# Altium PCB PCB1.PcbDoc
Units mm, origin at the board's own origin, x right, y up, seen from the top; angles counter-clockwise.
Board outline 80.2 x 98.1 mm, 2 copper layers (Top Layer, Bottom Layer); 114 components, 0 nets, 391 pads, 57 vias.
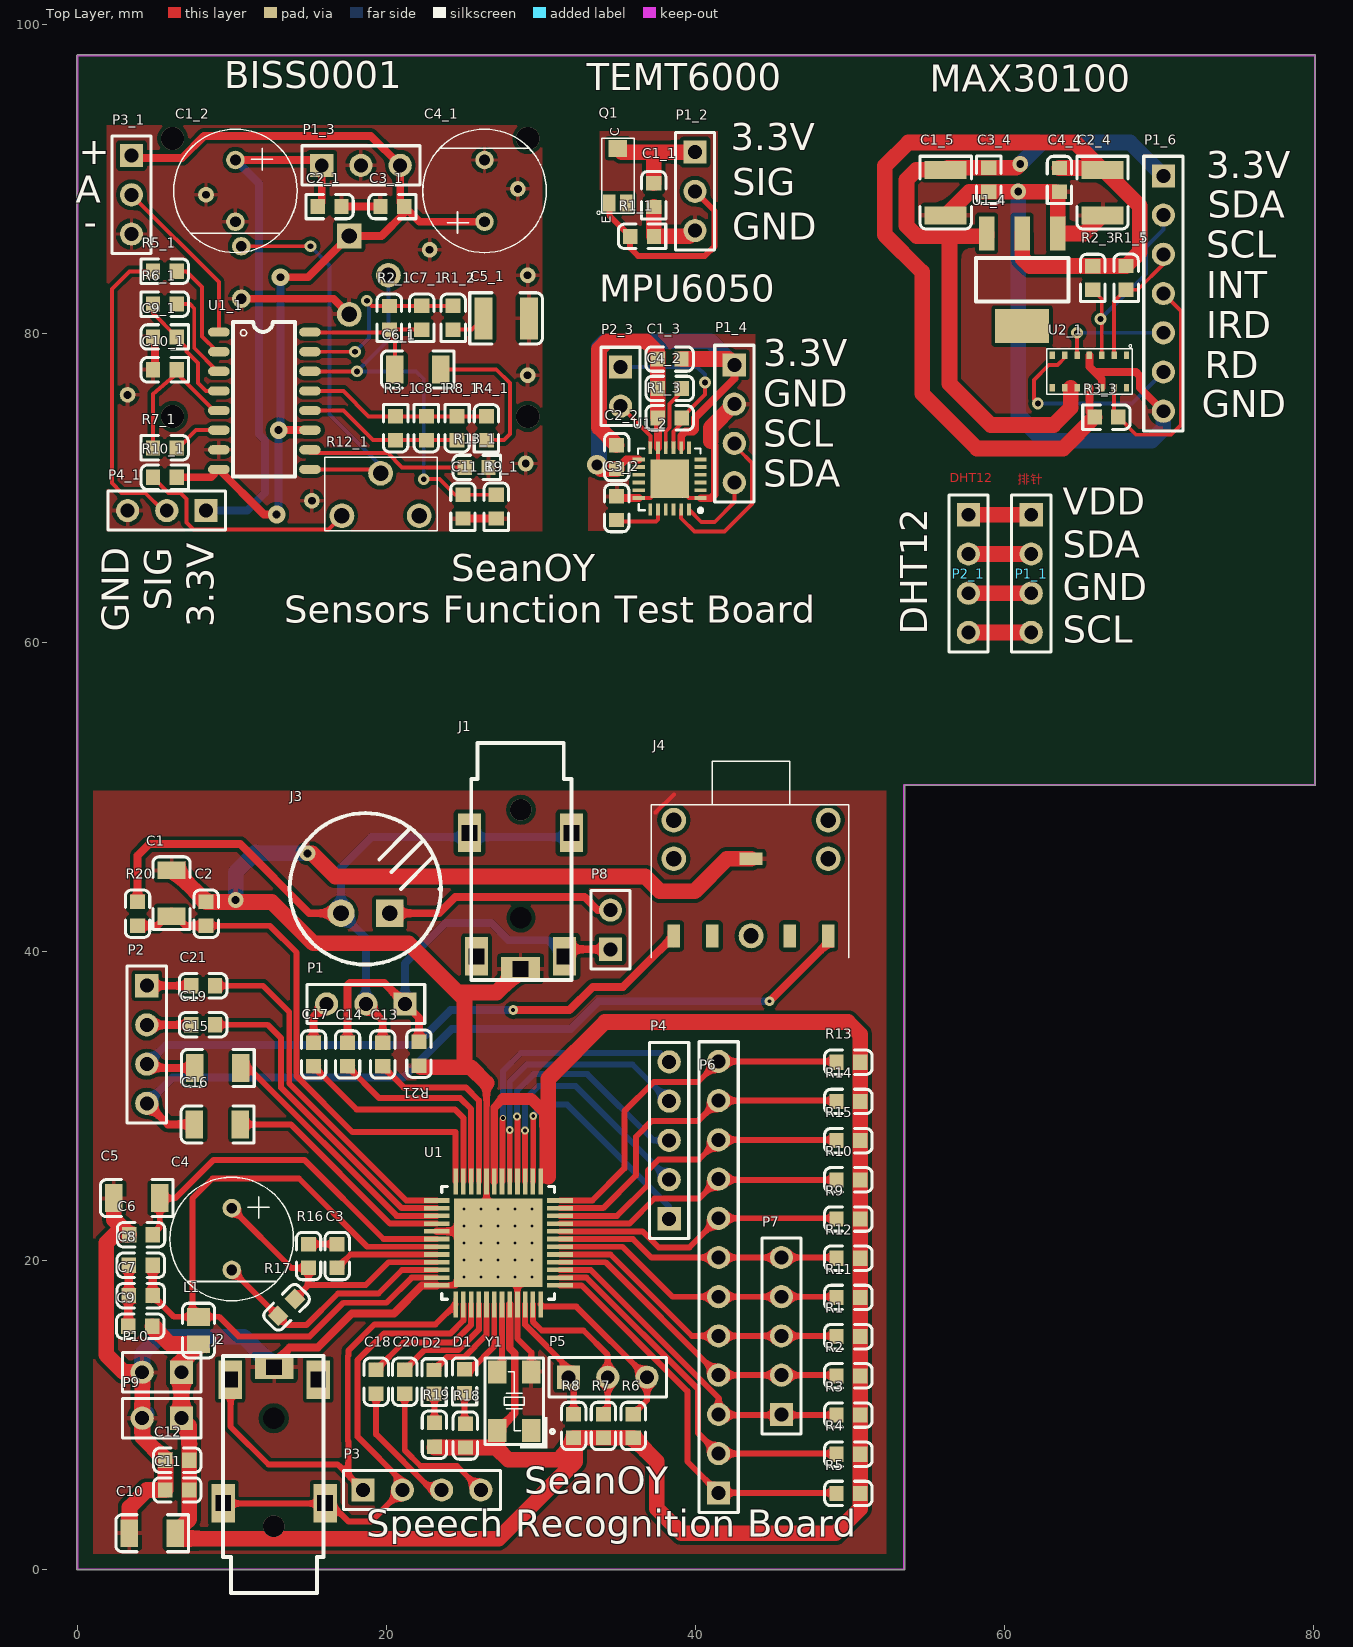
[diagram p0: Top Layer view]
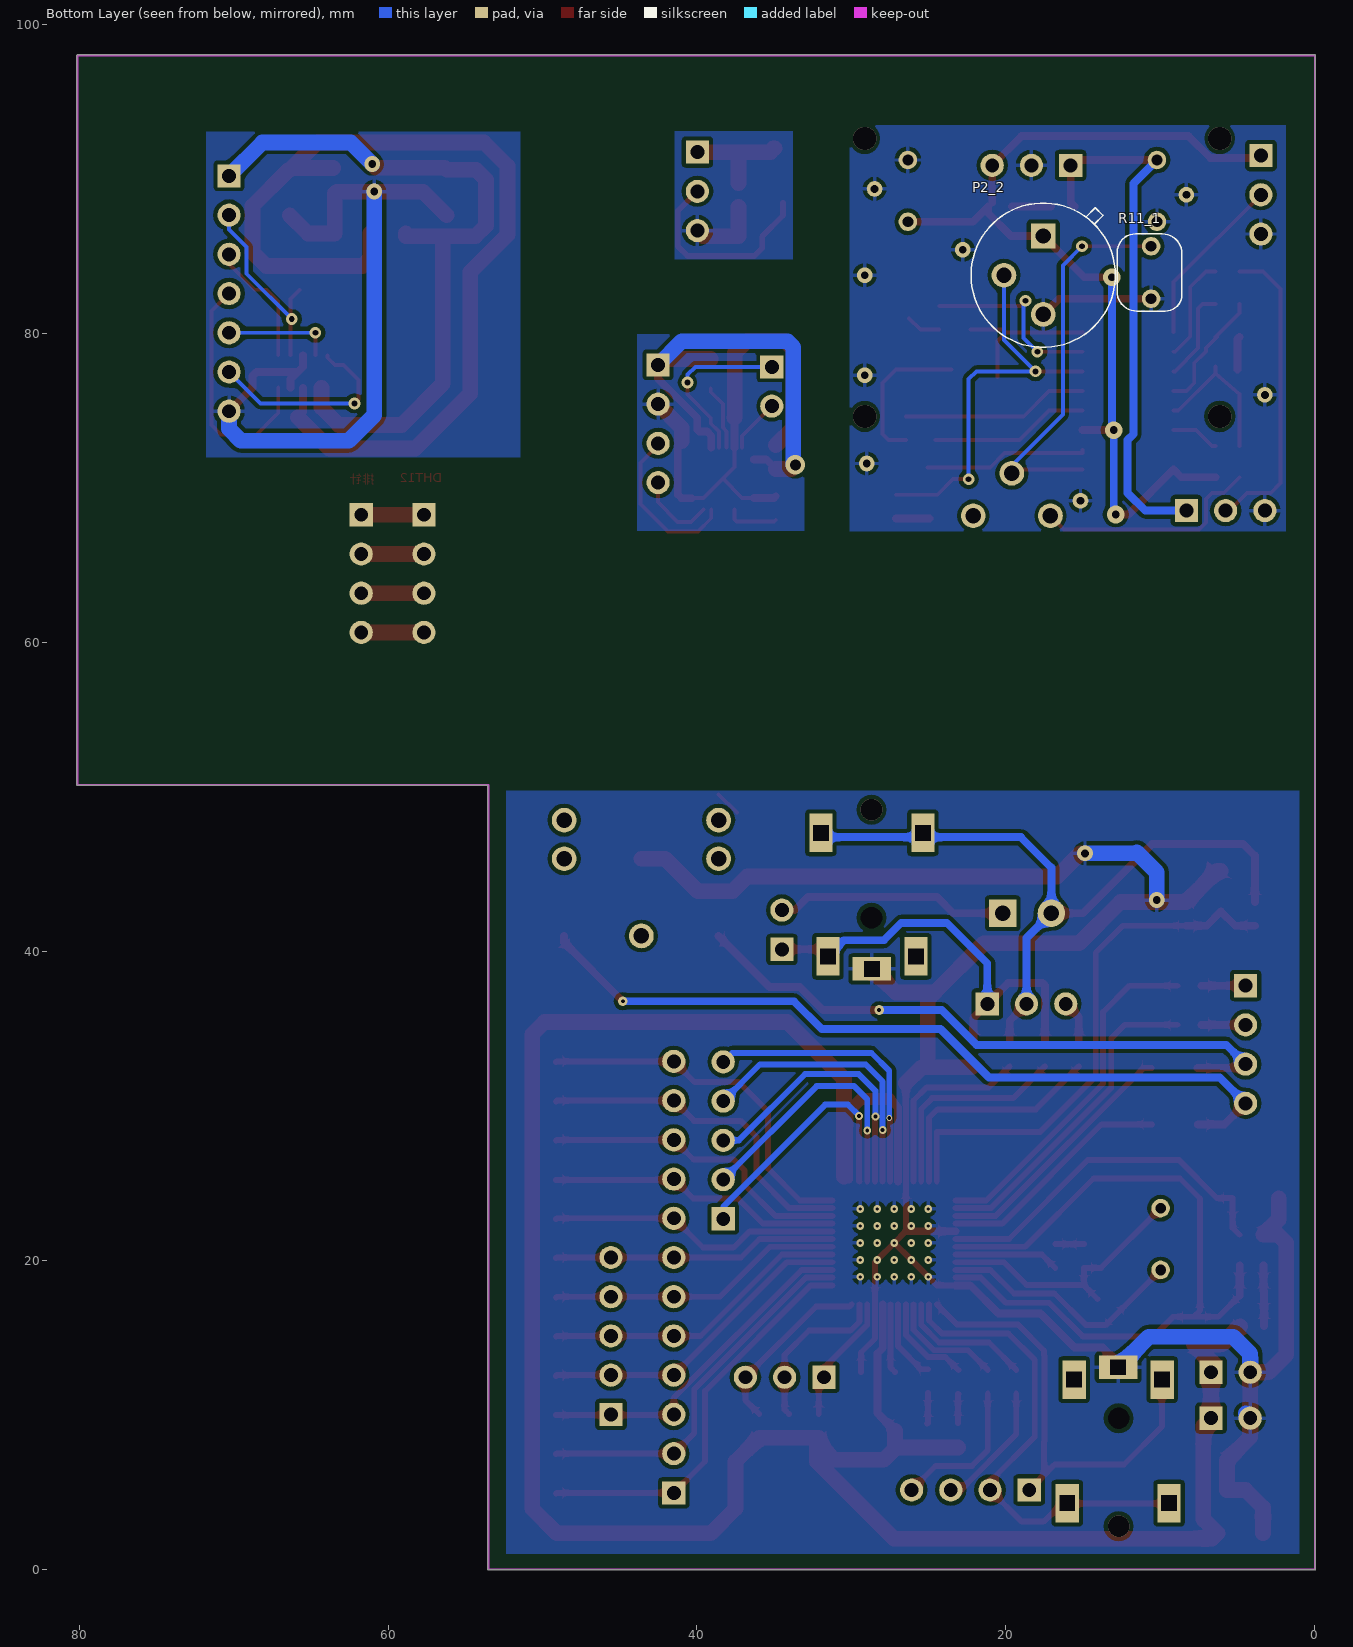
[diagram p1: Bottom Layer view, seen from below]

## Layer stack, top to bottom
Top Solder: solder mask 0.0102, Solder Resist, Dk 3.5
Top Layer: signal copper 0.0356
Dielectric 1: dielectric 0.32, FR-4, Dk 4.8
Bottom Layer: signal copper 0.0356
Bottom Solder: solder mask 0.0102, Solder Resist, Dk 3.5

## Board outline
0,-0.05 cw(c0,0) -0.05,0 -0.05,98 cw(c0,98) 0,98.05 80.1,98.05 cw(c80.1,98) 80.15,98 80.15,50.8 cw(c80.1,50.8) 80.1,50.75 53.55,50.75 53.55,0 cw(c53.5,0) 53.5,-0.05

## Design rules (kind name [scope] priority, off if disabled: settings)
Clearance [All] p1: gap=0.254 ignorepadtopadclearanceinfootprint=FALSE except(0: Arc-Hole Track-Hole SMDPad-Hole THPad-Hole Via-Hole Fill-Hole Poly-Hole Region-Hole Text-Hole)
PolygonConnect [All] p1: connectstyle=Relief reliefconductorwidth=0.254 reliefentries=4 polygonreliefangle="90 Angle" airgapwidth=0.254
RoutingVias [All] p1: holewidth=0.711 width=1.27 viastyle="Through Hole" minholewidth=0.711 minwidth=1.27 maxholewidth=0.711 maxwidth=1.27
SolderMaskExpansion [All] p1: expansion=0.102
Width [All] p1: maxlimit=1.016 minlimit=0.254 preferedwidth=0.254
30 further rules are at their usual default settings.

## Components (designator, comment, footprint, x,y, rotation, side; value= is the part's Value field where it differs from the comment)
C1 "Cap Pol1" 1206 6.075,43.775 r90 top value=10uF/16V
C1_1 "Cap" 0603 37.305,88.971 r90 top value=0.1uf (schematic designator C1)
C1_2 "Cap" 8*12 10.214,89.246 r270 top value=220uF (schematic designator C1)
C1_3 "Cap" 0603 38.328,78.359 r0 top value=0.1uF (schematic designator C1)
C1_5 "Cap Pol1" 1210 56.203,89.134 r270 top value=10uF (schematic designator C1)
C2 "Cap" 0603 8.317,42.435 r270 top value=0.1uF
C2_1 "Cap" 0603 16.31,88.23 r0 top value=0.1uF (schematic designator C2)
C2_2 "Cap" 0603 34.899,72.009 r90 top value=0.01uF (schematic designator C2)
C2_4 "Cap Pol1" 1210 66.363,89.134 r270 top value=10uF (schematic designator C2)
C3 "Cap" 0603 16.8,20.275 r270 top value=0.1uF
C3_1 "Cap" 0603 20.374,88.23 r180 top value=0.1uF (schematic designator C3)
C3_2 "Cap" 0603 34.899,68.707 r270 top value=2.2nF (schematic designator C3)
C3_4 "Cap" 0603 58.997,89.965 r270 top value=0.1uF (schematic designator C3)
C4 "Cap" 8*12 9.975,21.375 r270 top value=220uF
C4_1 "Cap" 8*12 26.343,89.246 r90 top value=220uF (schematic designator C4)
C4_2 "Cap" 0603 38.336,76.454 r0 top value=0.1uF (schematic designator C4)
C4_4 "Cap" 0603 63.569,89.954 r90 top value=0.1uF (schematic designator C4)
C5 "Cap Pol1" 1206 3.825,24.025 r180 top value=10uF/16V
C5_1 "Cap Pol1" 1210 27.74,80.991 r0 top (schematic designator C5)
C6 "Cap" 0603 4.1,21.65 r0 top value=0.1uF
C6_1 "Cap Pol1" 1206 22.025,77.689 r180 top value=10uF (schematic designator C6)
C7 "Cap" 0603 4.086,17.708 r180 top value=0.1uF
C7_1 "Cap" 0603 22.279,81.033 r90 top (schematic designator C7)
C8 "Cap" 0603 4.086,19.675 r180 top value=0.1uF
C8_1 "Cap" 0603 22.575,73.879 r270 top value=0.01uF (schematic designator C8)
C9 "Cap" 0603 4.05,15.725 r180 top value=0.1uF
C9_1 "Cap" 0603 5.642,79.789 r180 top value=0.1uF (schematic designator C9)
C10 "Cap Pol1" 1206 4.825,2.325 r180 top value=10uF/16V
C10_1 "Cap" 0603 5.642,77.664 r180 top value=0.1uF (schematic designator C10)
C11 "Cap" 0603 6.45,5.125 r0 top value=0.1uF
C11_1 "Cap" 0603 24.946,68.799 r90 top value=0.01uF (schematic designator C11)
C12 "Cap" 0603 6.45,7.05 r0 top value=0.1uF
C13 "Cap" 0603 19.75,33.325 r90 top value=1uF
C14 "Cap" 0603 17.475,33.325 r90 top value=1uF
C15 "Cap Pol1" 1206 9.075,32.45 r180 top value=10uF/16V
C16 "Cap Pol1" 1206 9.05,28.8 r180 top value=10uF/16V
C17 "Cap" 0603 15.275,33.325 r90 top value=1uF
C18 "Cap" 0603 19.325,12.135 r270 top value=1uF
C19 "Cap" 0603 8.121,35.25 r180 top value=1uF
C20 "Cap" 0603 21.175,12.135 r270 top value=1uF
C21 "Cap" 0603 8.121,37.775 r180 top value=1uF
D1 "LED2" 0603-LED 25.05,12.175 r270 top
D2 "LED2" 0603-LED 23.075,12.125 r270 top
J1 "PJ_322" PJ_322 28.7,51.175 r270 top
J2 "PJ_322" PJ_322 12.7,0.775 r90 top
J3 "Mic2" 9*7mic 18.625,44.05 r0 top
J4 "3.5-StereoSocket" 3F07 43.6,41 r270 top
L1 "Inductor" 0805 7.825,15.45 r270 top value=47uH
P1 "Header 3" HDR1X3 21.2,36.6 r180 top
P1_1 "Header 4" HDR1X4 61.742,68.274 r270 top (schematic designator P1)
P1_2 "Header 3" HDR1X3 39.972,91.757 r270 top (schematic designator P1)
P1_3 "Header 3" HDR1X3 15.802,90.897 r0 top (schematic designator P1)
P1_4 "Header 4" HDR1X4 42.519,77.978 r270 top (schematic designator P1)
P1_6 "Header 7" HDR1X7 70.3,90.219 r270 top (schematic designator P1)
P2 "Header 4" HDR1X4 4.475,37.78 r270 top
P2_1 "Header 4" HDR1X4 57.678,68.274 r270 top (schematic designator P2)
P2_2 "RE200B" RE200B 17.58,83.785 r270 bottom locked (schematic designator P2)
P2_3 "Header 2" HDR1X2 35.153,77.851 r270 top (schematic designator P2)
P3 "Header 4" HDR1X4 18.485,5.125 r0 top
P3_1 "Header 3" HDR1X3 3.483,91.532 r270 top (schematic designator P3)
P4 "Header 5" HDR1X5 38.3,22.685 r90 top
P4_1 "Header 3" HDR1X3 8.309,68.545 r180 top (schematic designator P4)
P5 "Header 3" HDR1X3 31.785,12.425 r0 top
P6 "Header 12" HDR1X12 41.5,4.94 r90 top
P7 "Header 5" HDR1X5 45.57,10.02 r90 top
P8 "Header 2" HDR1X2 34.5,40.135 r90 top
P9 "Header 2" HDR1X2 6.715,9.775 r180 top
P10 "Header 2" HDR1X2 6.715,12.75 r180 top
Q1 "Photo NPN" 1206-TEMT6000 34.977,88.455 r90 top
R1 "Res1" 0603 49.905,15.055 r0 top value=10K
R1_1 "Res2" 0603 36.543,86.304 r180 top value=1K (schematic designator R1)
R1_2 "Res2" 0603 24.311,81.033 r90 top value=4.7K (schematic designator R1)
R1_3 "Res1" 0603 38.336,74.549 r0 top value=4.7K (schematic designator R1)
R1_5 "Res2" 0603 67.887,83.615 r90 top value=472 (schematic designator R1)
R2 "Res1" 0603 49.905,12.516 r0 top value=10K
R2_1 "Res2" 0603 20.184,81.025 r90 top value=2M (schematic designator R2)
R2_3 "Res2" 0603 65.728,83.607 r90 top value=472 (schematic designator R2)
R3 "Res1" 0603 49.905,9.977 r0 top value=10K
R3_1 "Res2" 0603 20.586,73.879 r270 top value=1M (schematic designator R3)
R3_3 "Res2" 0603 66.617,74.598 r0 top value=472 (schematic designator R3)
R4 "Res1" 0603 49.905,7.439 r0 top value=10K
R4_1 "Res2" 0603 26.47,73.879 r90 top value=10K (schematic designator R4)
R5 "Res1" 0603 49.905,4.9 r0 top value=10K
R5_1 "Res2" 0603 5.642,84.039 r0 top value=4.7K (schematic designator R5)
R6 "Res1" 0603 35.971,9.27 r270 top value=10K
R6_1 "Res2" 0603 5.642,81.914 r0 top value=200K (schematic designator R6)
R7 "Res1" 0603 34.042,9.27 r270 top value=10K
R7_1 "Res2" 0603 5.642,72.609 r0 top value=4.7M (schematic designator R7)
R8 "Res1" 0603 32.113,9.27 r270 top value=10K
R8_1 "Res2" 0603 24.565,73.879 r270 top value=10K (schematic designator R8)
R9 "Res1" 0603 49.905,22.67 r0 top value=10K
R9_1 "Res2" 0603 27.105,68.799 r90 top value=47K (schematic designator R9)
R10 "Res1" 0603 49.905,25.209 r0 top value=10K
R10_1 "Res2" 0603 5.642,70.704 r180 top value=10k (schematic designator R10)
R11 "Res1" 0603 49.905,17.593 r0 top value=10K
R11_1 "Res2" photoresistor5539 10.595,83.961 r90 bottom value=1M (schematic designator R11)
R12 "Res1" 0603 49.905,20.132 r0 top value=10K
R12_1 "AdjustRes" RM063-503 17.112,68.208 r0 top (schematic designator R12)
R13 "Res1" 0603 49.905,32.825 r0 top value=10K
R13_1 "Res2" 0603 25.835,71.339 r180 top (schematic designator R13)
R14 "Res1" 0603 49.905,30.286 r0 top value=10K
R15 "Res1" 0603 49.905,27.748 r0 top value=10K
R16 "Res1" 0603 14.95,20.275 r270 top value=15K
R17 "Res1" 0603 13.525,16.95 r45 top value=33K
R18 "Res1" 0603 25.102,8.65 r270 top value=1K
R19 "Res1" 0603 23.1,8.7 r270 top value=1K
R20 "Res1" 0603 3.875,42.435 r270 top value=2K
R21 "Res1" 0603 22.1,33.375 r270 top value=2K
U1 "LD3320" QFN-48P 27.225,21.125 r270 top
U1_1 "BISS0001" BISS0001 10.065,70.752 r0 top locked (schematic designator U1)
U1_2 "MPU6050" QFN24 38.328,70.612 r180 top (schematic designator U1)
U1_4 "AMS1117-1.8" SOT-223 61.156,83.488 r90 top (schematic designator U1)
U2_1 "MAX30100" MAX30100 67.912,78.603 r270 top (schematic designator U2)
Y1 "22.1184MHz" 5*3.2 28.275,10.893 r180 top

## Footprints (in the part's own frame and the unit in brackets; to place one, negate y for a bottom-side part, rotate by r counter-clockwise, add the part's x,y. Pads: shape width x height; smd on the part's side, far side on the other; paste and mask are expansions set on the pad)
3F07 [mm]
  rect 0.8x1.5 smd: 1(-5,0)
  rect 1.5x0.8 smd: 2(0,5) 3(0,2.5) 4(0,-2.5) 5(0,-5)
  round 1.6 hole 1: ""(-7.5,5) ""(-7.5,-5) ""(-5,5) ""(-5,-5) ""(0,0)
  silkscreen extent -11.32,-6.45 1.43,6.32
5*3.2 [mm]
  rect 1.2x1.5 smd: 1(-1.1,1.923) 2(-1.1,-1.877) 3(1.1,-1.877) 4(1.1,1.923)
  silkscreen extent -2.59,-2.78 1.9,3.07, body extent -1.6,-2.48 1.6,2.52, height 1
8*12 [mm]
  round 1.2 hole 0.7: 1(-2,0) 2(2,0)
  silkscreen extent -4,-4 4,4
9*7mic [mil]
  rect 70x70 hole 40: 1(62.01,-62.01)
  round 70 hole 40: 2(-62.01,-62.01)
  silkscreen extent -193,-193 193,193
0603 [mm]
  rect 0.93x0.98 smd: 1(-0.77,0) 2(0.77,0)
  silkscreen extent -1.53,-0.79 1.54,0.79, body extent -0.8,-0.4 0.8,0.4, height 0.3
0603-LED [mm]
  rect 0.93x0.98 smd: 1(0.77,0) 2(-0.77,0)
  silkscreen extent -1.5,-0.79 1.53,0.79, body extent -0.8,-0.4 0.8,0.4, height 0.6
0805 [mm]
  rect 1.16x1.47 smd: 1(-0.89,0) 2(0.89,0)
  silkscreen extent -1.77,-1.04 1.77,1.04, body extent -1,-0.62 1,0.63, height 0.77
1206 [mm]
  rect 1.13x1.8 smd: 1(-1.49,0) 2(1.49,0)
  silkscreen extent -2.36,-1.2 2.35,1.2, body extent -1.6,-0.81 1.6,0.79, height 1
1206-TEMT6000 [mm]
  rect 1.1x1.2 smd: 1(3.55,0)
  rect 1.1x0.8 smd: 2(0,-0.55) 3(0,0.55)
  silkscreen extent -0.74,-1.05 4.2,1.36
1210 [mm]
  rect 1.16x2.72 smd: 1(-1.475,0) 2(1.475,0)
  silkscreen extent -2.36,-1.66 2.35,1.66, body extent -1.6,-1.25 1.6,1.25, height 1.3
BISS0001 [mm]
  oval 1.4x0.6 smd: 1(-0.925,9.35) 2(-0.925,8.08) 3(-0.925,6.81) 4(-0.925,5.54) 5(-0.925,4.27) 6(-0.925,3) 7(-0.925,1.73) 8(-0.925,0.46) 9(4.975,0.46) 10(4.975,1.73) 11(4.975,3) 12(4.975,4.27) 13(4.975,5.54) 14(4.975,6.81) 15(4.975,8.08) 16(4.975,9.35)
  silkscreen extent 0,0 4,10
HDR1X2 [mm] "Connector; Header; 2 Position"
  rect 1.5x1.5 hole 0.9: 1(0,0)
  round 1.5 hole 0.9: 2(2.54,0)
  silkscreen extent -1.27,-1.27 3.81,1.27
HDR1X3 [mm] "Connector; Header; 3 Position"
  rect 1.5x1.5 hole 0.9: 1(0,0)
  round 1.5 hole 0.9: 2(2.54,0) 3(5.08,0)
  silkscreen extent -1.27,-1.27 6.35,1.27
HDR1X4 [mm] "Connector; Header; 4 Position"
  rect 1.5x1.5 hole 0.9: 1(0,0)
  round 1.5 hole 0.9: 2(2.54,0) 3(5.08,0) 4(7.62,0)
  silkscreen extent -1.27,-1.27 8.89,1.27
HDR1X5 [mm] "Connector; Header; 5 Position"
  rect 1.5x1.5 hole 0.9: 1(0,0)
  round 1.5 hole 0.9: 2(2.54,0) 3(5.08,0) 4(7.62,0) 5(10.16,0)
  silkscreen extent -1.27,-1.27 11.43,1.27
HDR1X7 [mm] "Connector; Header; 7 Position"
  rect 1.5x1.5 hole 0.9: 1(0,0)
  round 1.5 hole 0.9: 2(2.54,0) 3(5.08,0) 4(7.62,0) 5(10.16,0) 6(12.7,0) 7(15.24,0)
  silkscreen extent -1.27,-1.27 16.51,1.27
HDR1X12 [mm] "Connector; Header; 12 Position"
  rect 1.5x1.5 hole 0.9: 1(0,0)
  round 1.5 hole 0.9: 2(2.54,0) 3(5.08,0) 4(7.62,0) 5(10.16,0) 6(12.7,0) 7(15.24,0) 8(17.78,0) 9(20.32,0) 10(22.86,0) 11(25.4,0) 12(27.94,0)
  silkscreen extent -1.27,-1.27 29.21,1.27
MAX30100 [mm]
  rect 0.5x0.35 smd: 1(0,0) 2(0,-0.8) 3(0,-1.6) 4(0,-2.4) 5(0,-3.2) 6(0,-4) 7(0,-4.8) 8(2.1,-4.8) 9(2.1,-4) 10(2.1,-3.2) 11(2.1,-2.4) 12(2.1,-1.6) 13(2.1,-0.8) 14(2.1,0)
  silkscreen extent -0.69,-5.15 2.52,0.38
photoresistor5539 [mm]
  round 1.2 hole 0.7: 1(-1.7,0) 2(1.7,0)
  silkscreen extent -2.5,-2 2.5,2.2
PJ_322 [mm]
  rect 1.5x2.5 hole 1 square: 1(12.3,-0.025)
  rect 2.5x1.5 hole 1 square: 2(11.5,2.825) 3(3.5,3.275) 3(3.5,-3.325) 4(11.5,-2.875)
  silkscreen extent -2.32,-3.22 13.03,3.28
QFN24 [mm] "QFN24"
  rect 0.8x0.25 smd: 1(-2,1.25) 2(-2,0.75) 3(-2,0.25) 4(-2,-0.25) 5(-2,-0.75) 6(-2,-1.25) 13(2,-1.25) 14(2,-0.75) 15(2,-0.25) 16(2,0.25) 17(2,0.75) 18(2,1.25)
  rect 0.25x0.8 smd: 7(-1.25,-2) 8(-0.75,-2) 9(-0.25,-2) 10(0.25,-2) 11(0.75,-2) 12(1.25,-2) 19(1.25,2) 20(0.75,2) 21(0.25,2) 22(-0.25,2) 23(-0.75,2) 24(-1.25,2)
  rect 2.5x2.5 smd: 25(0,0)
  silkscreen extent -2.11,-1.95 2.05,2.16
QFN-48P [mm]
  rect 1.68x0.3 smd: 1(-3.975,2.75) 2(-3.975,2.25) 3(-3.975,1.75) 4(-3.975,1.25) 5(-3.975,0.75) 6(-3.975,0.25) 7(-3.975,-0.25) 8(-3.975,-0.75) 9(-3.975,-1.25) 10(-3.975,-1.75) 11(-3.975,-2.25) 12(-3.975,-2.75) 25(3.975,-2.75) 26(3.975,-2.25) 27(3.975,-1.75) 28(3.975,-1.25) 29(3.975,-0.75) 30(3.975,-0.25) 31(3.975,0.25) 32(3.975,0.75) 33(3.975,1.25) 34(3.975,1.75) 35(3.975,2.25) 36(3.975,2.75)
  round 0.5 on Top Overlay: 3(-4.2,4.25)
  rect 0.3x1.68 smd: 13(-2.75,-3.975) 14(-2.25,-3.975) 15(-1.75,-3.975) 16(-1.25,-3.975) 17(-0.75,-3.975) 18(-0.25,-3.975) 19(0.25,-3.975) 20(0.75,-3.975) 21(1.25,-3.975) 22(1.75,-3.975) 23(2.25,-3.975) 24(2.75,-3.975) 37(2.75,4) 38(2.25,4) 39(1.75,4) 40(1.25,4) 41(0.75,4) 42(0.25,4) 43(-0.25,4) 44(-0.75,4) 45(-1.25,4) 46(-1.75,4) 47(-2.25,4) 48(-2.75,4)
  rect 5.73x5.73 smd: 49(0,0)
  silkscreen extent -3.65,-3.65 3.65,3.65, body extent -3.5,-3.56 3.5,3.44, height 1
RE200B [mm]
  rect 1.6x1.6 hole 1: 1(-2.54,0)
  round 1.6 hole 1: 2(0,-2.54) 3(2.54,0)
  silkscreen extent -4.67,-4.67 4.67,4.67
RM063-503 [mm]
  round 1.6 hole 1: 1(0,0) 2(2.5,2.75) 3(5,0)
  silkscreen extent -1.1,-0.97 6.17,3.8
SOT-223 [mm]
  rect 2.2x1 smd: 1(3,-2.3) 2(3,0) 3(3,2.3)
  rect 2.2x3.5 smd: ""(-3,0)
  silkscreen extent -1.4,-3 1.4,3, body extent -3.49,-3.24 3.49,3.24, height 1.64

## Part data
C1 C1_5 C2_4 C5 C5_1 C6_1 C10 C15 C16: "Polarized Capacitor (Radial)"
  C1 C1_5 C2_4 C5 C6_1 C10 C15 C16: LatestRevisionDate=17-Jul-2002, LatestRevisionNote="Re-released for DXP Platform.", PackageDescription="Polarized Capacitor (Radial); 2 Leads", PackageReference=RB7.6-15, Published=8-Jun-2000, Publisher="Altium Limited"
C1_1 C1_2 C1_3 C2 C2_1 C2_2 C3 C3_1 C3_2 C3_4 C4 C4_1 C4_2 C4_4 C6 C7 C7_1 C8 C8_1 C9 C9_1 C10_1 C11 C11_1 C12 C13 C14 C17 C18 C19 C20 C21: "Capacitor"
  C1_1 C1_2 C1_3 C2 C2_1 C2_2 C3 C3_1 C3_2 C3_4 C4 C4_1 C4_2 C4_4 C6 C7 C8 C8_1 C9 C9_1 C10_1 C11 C11_1 C12 C13 C14 C17 C18 C19 C20 C21: LatestRevisionDate=17-Jul-2002, LatestRevisionNote="Re-released for DXP Platform.", PackageDescription="Radial Cap, Thru-Hole; 2 Leads; 0.3 in Pin Spacing", PackageReference=RAD-0.3, Published=8-Jun-2000, Publisher="Altium Limited"
D1 D2: "Typical RED, GREEN, YELLOW, AMBER GaAs LED", LatestRevisionDate=17-Jul-2002, LatestRevisionNote="Re-released for DXP Platform.", PackageDescription="SM LED; 2 Flat Leads", PackageReference=3.2X1.6X1.1, PackageVersion=Feb-2002, Published=8-Jun-2000, Publisher="Altium Limited"
J3: "Microphone", LatestRevisionDate=17-Jul-2002, LatestRevisionNote="Re-released for DXP Platform.", PackageReference=PIN2, Published=24-Mar-1999, Publisher="Altium Limited"
J4: "AudioSocket"
P1 P1_2 P1_3 P3_1 P4_1 P5: "Header, 3-Pin"
  P1 P1_2 P1_3 P4_1 P5: LatestRevisionDate=17-Jul-2002, LatestRevisionNote="Re-released for DXP Platform.", Publisher="Altium Limited"
P1_1 P1_4 P2 P2_1 P3: "Header, 4-Pin", LatestRevisionDate=17-Jul-2002, LatestRevisionNote="Re-released for DXP Platform.", Publisher="Altium Limited"
P1_6: "Header, 7-Pin", LatestRevisionDate=17-Jul-2002, LatestRevisionNote="Re-released for DXP Platform.", Publisher="Altium Limited"
P2_2 U1_1: "Infrared Sensor"
P2_3 P8 P9 P10: "Header, 2-Pin", LatestRevisionDate=17-Jul-2002, LatestRevisionNote="Re-released for DXP Platform.", Publisher="Altium Limited"
P4 P7: "Header, 5-Pin", LatestRevisionDate=17-Jul-2002, LatestRevisionNote="Re-released for DXP Platform.", Publisher="Altium Limited"
P6: "Header, 12-Pin", LatestRevisionDate=17-Jul-2002, LatestRevisionNote="Re-released for DXP Platform.", Publisher="Altium Limited"
Q1: "NPN Phototransistor", Code_JEDEC=TO-220-AC, LatestRevisionDate=17-Jul-2002, LatestRevisionNote="Re-released for DXP Platform.", PackageReference=TO-220_A, Published=24-Mar-1999, Publisher="Altium Limited"
R1 R1_1 R1_2 R1_3 R1_5 R2 R2_1 R2_3 R3 R3_1 R3_3 R4 R4_1 R5 R5_1 R6 R6_1 R7 R7_1 R8 R8_1 R9 R9_1 R10 R10_1 R11 R11_1 R12 R13 R13_1 R14 R15 R16 R17 R18 R19 R20 R21: "Resistor"
  R1 R1_3 R2 R3 R4 R5 R6 R7 R8 R9 R10 R11 R12 R13 R14 R15 R16 R17 R18 R19 R20 R21: LatestRevisionDate=17-Jul-2002, LatestRevisionNote="Re-released for DXP Platform.", PackageDescription="Axial Device, Thru-Hole; 2 Leads; 0.3 in Pin Spacing", PackageReference=AXIAL-0.3, Published=8-Jun-2000, Publisher="Altium Limited"
  R1_1 R1_2 R1_5 R2_1 R2_3 R3_1 R3_3 R4_1 R5_1 R6_1 R7_1 R8_1 R9_1 R10_1 R11_1: LatestRevisionDate=17-Jul-2002, LatestRevisionNote="Re-released for DXP Platform.", PackageDescription="Axial Device, Thru-Hole; 2 Leads; 0.4 in Pin Spacing", PackageReference=AXIAL-0.4, Published=8-Jun-2000, Publisher="Altium Limited"
R12_1: library part RM063-503, "RM063-503"
U1: "SpeechRecognition"
U1_2: "IMU"
U1_4: "3.3V~12V->1.8V"
Y1: library part SPXO, "oscillator"
L1: Code_IEC=1005, Code_JEITA=0402, LatestRevisionDate=29-May-2009, LatestRevisionNote="IPC-7351 Footprint Added.", PackageDescription="Chip Inductor", PackageReference=0402-A, Published=8-Jun-2000, Publisher="Altium Limited"

## Free pads (board coordinates)
  round 1.016 hole 0.508: 2(15.167,69.18) 3(3.229,76.038) 4(22.787,85.436) 5(8.309,88.992) 6(28.502,89.373) 7(29.137,83.785) 8(29.137,77.308) 9(29.01,71.593)

## Via types
v1: diameter 0.5, hole 0.2, Top Layer to Bottom Layer, 25 vias
v2: diameter 0.762, hole 0.381, Top Layer to Bottom Layer, 9 vias
v3: diameter 1.016, hole 0.508, Top Layer to Bottom Layer, 4 vias
v4: diameter 1.5, hole 1.5, Top Layer to Bottom Layer, 4 vias
v5: diameter 0.508, hole 0.254, Top Layer to Bottom Layer, 4 vias
v6: diameter 1.143, hole 0.508, Top Layer to Bottom Layer, 3 vias
v7: diameter 1.4, hole 1.4, Top Layer to Bottom Layer, 2 vias
v8: diameter 1.25/1.25 (per signal layer), hole 1.4, Top Layer to Bottom Layer, 2 vias
v9: diameter 0.635, hole 0.254, Top Layer to Bottom Layer, 2 vias
v10: diameter 1.27, hole 0.711, Top Layer to Bottom Layer, 1 vias
v11: diameter 0.381, hole 0.254, Top Layer to Bottom Layer, 1 vias

## Nets (pads, with @x,y where several pads share a name; then routed paths per layer and width w, separated by ;. In a path a pad name is that pad's centre, name@x,y a point inside that pad or via, vN(x,y) a via of type N, cw(c..) or ccw(c..) an arc to the next point about the centre after c; other vN are vias at no path point)
pads on no net: C1.1 C1.2 C1_1.1 C1_1.2 C1_2.1 C1_2.2 C1_3.1 C1_3.2 C1_5.1 C1_5.2 C2.1 C2.2 C2_1.1 C2_1.2 C2_2.1 C2_2.2 C2_4.1 C2_4.2 C3.1 C3.2 C3_1.1 C3_1.2 C3_2.1 C3_2.2 C3_4.1 C3_4.2 C4.1 C4.2 C4_1.1 C4_1.2 C4_2.1 C4_2.2 C4_4.1 C4_4.2 C5.1 C5.2 C5_1.1 C5_1.2 C6.1 C6.2 C6_1.1 C6_1.2 C7.1 C7.2 C7_1.1 C7_1.2 C8.1 C8.2 C8_1.1 C8_1.2 C9.1 C9.2 C9_1.1 C9_1.2 C10.1 C10.2 C10_1.1 C10_1.2 C11.1 C11.2 C11_1.1 C11_1.2 C12.1 C12.2 C13.1 C13.2 C14.1 C14.2 C15.1 C15.2 C16.1 C16.2 C17.1 C17.2 C18.1 C18.2 C19.1 C19.2 C20.1 C20.2 C21.1 C21.2 D1.1 D1.2 D2.1 D2.2 J1.1 J1.2 J1.3 J1.4 J2.1 J2.2 J2.3 J2.4 J3.1 J3.2 J4. J4.1 J4.2 J4.3 J4.4 J4.5 L1.1 L1.2 P1.1 P1.2 P1.3 P1_1.1 P1_1.2 P1_1.3 P1_1.4 P1_2.1 P1_2.2 P1_2.3 P1_3.1 P1_3.2 P1_3.3 P1_4.1 P1_4.2 P1_4.3 P1_4.4 P1_6.1 P1_6.2 P1_6.3 P1_6.4 P1_6.5 P1_6.6 P1_6.7 P2.1 P2.2 P2.3 P2.4 P2_1.1 P2_1.2 P2_1.3 P2_1.4 P2_2.1 P2_2.2 P2_2.3 P2_3.1 P2_3.2 P3.1 P3.2 P3.3 P3.4 P3_1.1 P3_1.2 P3_1.3 P4.1 P4.2 P4.3 P4.4 P4.5 P4_1.1 P4_1.2 P4_1.3 P5.1 P5.2 P5.3 P6.1 P6.2 P6.3 P6.4 P6.5 P6.6 P6.7 P6.8 P6.9 P6.10 P6.11 P6.12 P7.1 P7.2 P7.3 P7.4 P7.5 P8.1 P8.2 P9.1 P9.2 P10.1 P10.2 Q1.1 Q1.2 Q1.3 R1.1 R1.2 R1_1.1 R1_1.2 R1_2.1 R1_2.2 R1_3.1 R1_3.2 R1_5.1 R1_5.2 R2.1 R2.2 R2_1.1 R2_1.2 R2_3.1 R2_3.2 R3.1 R3.2 R3_1.1 R3_1.2 R3_3.1 R3_3.2 R4.1 R4.2 R4_1.1 R4_1.2 R5.1 R5.2 R5_1.1 R5_1.2 R6.1 R6.2 R6_1.1 R6_1.2 R7.1 R7.2 R7_1.1 R7_1.2 R8.1 R8.2 R8_1.1 R8_1.2 R9.1 R9.2 R9_1.1 R9_1.2 R10.1 R10.2 R10_1.1 R10_1.2 R11.1 R11.2 R11_1.1 R11_1.2 R12.1 R12.2 R12_1.1 R12_1.2 R12_1.3 R13.1 R13.2 R13_1.1 R13_1.2 R14.1 R14.2 R15.1 R15.2 R16.1 R16.2 R17.1 R17.2 R18.1 R18.2 R19.1 R19.2 R20.1 R20.2 R21.1 R21.2 U1.1 U1.2 U1.3 U1.4 U1.5 U1.6 U1.7 U1.8 U1.9 U1.10 U1.11 U1.12 U1.13 U1.14 U1.15 U1.16 U1.17 U1.18 U1.19 U1.20 U1.21 U1.22 U1.23 U1.24 U1.25 U1.26 U1.27 U1.28 U1.29 U1.30 U1.31 U1.32 U1.33 U1.34 U1.35 U1.36 U1.37 U1.38 U1.39 U1.40 U1.41 U1.42 U1.43 U1.44 U1.45 U1.46 U1.47 U1.48 U1.49 U1_1.1 U1_1.2 U1_1.3 U1_1.4 U1_1.5 U1_1.6 U1_1.7 U1_1.8 U1_1.9 U1_1.10 U1_1.11 U1_1.12 U1_1.13 U1_1.14 U1_1.15 U1_1.16 U1_2.1 U1_2.2 U1_2.3 U1_2.4 U1_2.5 U1_2.6 U1_2.7 U1_2.8 U1_2.9 U1_2.10 U1_2.11 U1_2.12 U1_2.13 U1_2.14 U1_2.15 U1_2.16 U1_2.17 U1_2.18 U1_2.19 U1_2.20 U1_2.21 U1_2.22 U1_2.23 U1_2.24 U1_2.25 U1_4. U1_4.1 U1_4.2 U1_4.3 U2_1.1 U2_1.2 U2_1.3 U2_1.4 U2_1.5 U2_1.6 U2_1.7 U2_1.8 U2_1.9 U2_1.10 U2_1.11 U2_1.12 U2_1.13 U2_1.14 Y1.1 Y1.2 Y1.3 Y1.4
copper on no net: | length 1946.1
  Top Layer w0.254: 3.483,88.992 9.14,83.335 9.14,80.102 ; 4.872,70.704 5.888,69.688 6.658,69.688 7.039,69.307 7.039,67.776 7.49,67.325 16.229,67.325 17.112,68.208 ; 4.872,81.914 4.872,81.329 6.412,79.789 ; 4.872,84.039 3.356,84.039 2.213,82.896 2.213,70.323 2.848,69.688 4.372,69.688 5.515,68.545 5.769,68.545 ; 4.88,72.736 4.88,76.094 6.431,77.429 ; 6.336,79.789 7.039,79.086 7.039,78.852 7.801,78.09 7.801,76.8 8.309,76.292 9.14,76.292 ; 6.412,72.736 6.658,72.736 7.674,73.752 9.14,73.752 ; 6.412,81.914 7.259,81.914 7.547,81.626 7.547,79.062 9.047,77.562 9.14,77.562 ; 6.412,84.039 7.039,84.039 8.059,83.019 8.059,79.82 9.047,78.832 9.14,78.832 ; 6.431,77.892 6.431,77.429 ; 9.14,75.022 8.838,75.022 6.431,77.429 ; 10.595,85.661 v2(15.069,85.661) ; 15.04,71.212 19.358,71.212 ; 15.04,72.482 15.04,72.263 20.085,72.263 21.009,71.339 25.065,71.339 ; 15.04,75.022 17.199,75.022 19.112,73.109 20.586,73.109 22.575,73.109 24.565,73.109 ; 15.04,76.292 17.199,76.292 18.842,74.649 20.586,74.649 26.47,74.649 ; 15.04,77.562 v2(18.088,77.562) ; 15.04,78.832 v2(17.961,78.832) ; 15.04,80.102 15.04,80.064 19.993,80.064 ; v2(18.723,82.134) 19.062,81.795 20.184,81.795 24.303,81.795 ; 20.535,77.181 20.535,79.522 19.993,80.064 ; 22.279,80.263 20.191,80.263 20.184,80.255 19.993,80.064 ; v2(22.406,70.577) 23.422,70.577 24.43,69.569 24.946,69.569 27.105,69.569 ; 23.515,77.689 27.105,77.689 27.994,76.8 27.994,73.498 27.605,73.109 26.47,73.109 ; 24.311,80.263 25.537,80.263 26.265,80.991 ; 34.899,67.937 35.005,67.831 37.452,67.831 37.578,67.957 37.578,68.612 ; 35.153,75.311 37.078,73.386 37.078,72.612 ; 36.328,69.362 37.078,69.362 38.328,70.612 ; 37.419,48.989 38.6,50.17 ; 37.578,72.612 37.578,71.362 38.328,70.612 ; 38.078,72.612 38.078,73.664 38.328,73.914 38.328,75.438 39.106,76.216 39.106,76.454 ; 38.578,72.612 38.578,73.656 39.106,74.184 39.106,74.549 40.614,76.057 v2(40.614,76.835) ; 39.078,68.612 39.078,68.048 39.943,67.183 41.884,67.183 43.662,68.961 43.662,71.628 42.773,72.517 42.519,72.517 ; 39.584,68.612 40.378,67.818 41.249,67.818 42.519,69.088 42.519,69.977 ; 40.328,69.362 39.578,69.362 38.328,70.612 ; v2(62.172,75.487) 61.918,75.741 61.918,77.011 62.879,77.972 63.445,77.972 63.912,78.439 63.912,78.603 ; 64.712,78.603 v2(64.712,80.059) ; 65.728,82.837 66.312,82.253 66.312,78.603 ; 67.112,76.503 67.112,74.873 67.387,74.598 68.53,73.455 70.808,73.455 71.443,74.09 71.443,81.456 70.3,82.599 ; 67.112,78.603 67.112,82.07 67.887,82.845 68.641,82.845 70.3,84.504 70.3,85.139
  Top Layer w0.381: 4.856,17.708 6.224,16.34 7.825,16.34 ; 4.87,21.65 5.315,22.095 5.315,24.025 6.325,24.025 8.8,26.5 14.675,26.5 19.8,21.375 23.25,21.375 ; 8.317,41.665 12.435,41.665 14.175,39.925 14.175,31.925 17.8,28.3 24.475,28.3 24.475,25.1 ; 8.891,35.25 12.3,35.25 13.175,34.375 13.175,31.175 20.975,23.375 23.25,23.375 ; 8.891,37.775 12,37.775 13.7,36.075 13.7,31.45 21.275,23.875 23.25,23.875 ; 9.45,4.575 9.775,4.25 16.375,4.25 17.55,3.075 18.975,3.075 21.025,5.125 21.025,5.675 18.125,8.575 18.125,13.55 19.825,15.25 24.125,15.25 24.975,16.1 24.975,17.15 ; 9.9,12.575 9.9,9.225 12.35,6.775 16.835,6.775 17.525,6.085 ; 9.975,19.375 13.55,15.8 14.8,15.8 16.85,17.85 19.475,17.85 21,19.375 23.25,19.375 ; 9.975,23.375 13.845,19.505 14.95,19.505 14.95,18.375 ; 10.525,28.8 13.8,28.8 20.225,22.375 23.25,22.375 ; 10.55,32.45 11.075,32.45 20.65,22.875 23.25,22.875 ; 14.069,17.494 14.95,18.375 ; 14.95,21.045 16.8,21.045 ; 15.275,32.555 18.055,29.775 24.425,29.775 24.975,29.225 24.975,25.1 ; 16.8,19.505 17.67,20.375 23.25,20.375 ; 17.475,32.555 19.53,30.5 24.775,30.5 25.475,29.8 25.475,25.1 ; 18.485,5.125 17.525,6.085 ; 19.325,11.365 19.325,8.725 22.925,5.125 23.565,5.125 ; 19.325,12.905 21.095,14.675 24.325,14.675 25.475,15.825 25.475,17.15 ; 19.75,32.555 21.105,31.2 25.125,31.2 25.975,30.35 25.975,25.1 ; 21.175,11.365 21.175,7.7 22.2,6.675 24.555,6.675 26.105,5.125 ; 21.175,12.905 22.445,14.175 24.65,14.175 25.975,15.5 25.975,17.15 ; 22.1,32.605 22.205,32.5 ; 23.075,11.355 23.1,11.33 23.1,9.47 ; 23.075,12.895 23.905,13.725 25.025,13.725 26.475,15.175 26.475,17.15 ; 23.25,18.375 24.475,18.375 v1(25.025,18.925) v1(26.125,20.025) v1(27.225,21.125) ; 23.25,18.875 21.625,18.875 20,17.25 17.2,17.25 15.025,15.075 10.425,15.075 9.16,16.34 7.825,16.34 ; 23.25,19.875 20.125,19.875 18.65,18.4 14.975,18.4 14.95,18.375 ; 23.25,20.875 18.75,20.875 14.325,25.3 8.725,25.3 7.425,24 7.425,16.74 7.825,16.34 ; 24.475,17.15 23.175,15.85 19.225,15.85 17.525,14.15 17.525,13.848 17.49,13.813 17.49,8.312 17.525,8.277 17.525,6.085 ; 25.05,11.405 25.05,9.472 25.102,9.42 ; 25.05,12.945 25.495,12.945 26.975,14.425 26.975,17.15 ; 26.475,31.475 26.475,25.1 26.475,21.875 v1(27.225,21.125) ; 27.175,12.77 27.475,13.07 27.475,17.15 ; 27.5,25.1 v11@27.5,29.175 ; 27.975,25.1 v5(27.975,28.425) ; v5(28.45,29.3) 28.475,29.275 28.475,25.1 ; 28.975,17.15 28.975,15.825 31.785,13.015 31.785,12.425 32.113,12.097 32.113,10.04 ; 28.975,25.1 v5(28.975,28.4) ; 29.375,12.77 29.375,14.025 28.475,14.925 28.475,17.15 28.475,19.875 v1(28.325,20.025) v1(27.225,21.125) ; 29.475,17.15 29.475,16.025 30.05,15.45 32.75,15.45 34.325,13.875 34.325,12.425 34.325,10.323 34.042,10.04 ; 29.475,25.1 29.5,25.125 v5(29.5,29.35) ; 29.975,17.15 30.125,17 32.29,17 36.865,12.425 36.865,10.934 35.971,10.04 ; 31.225,18.375 32.625,18.375 39.475,11.525 39.475,6.965 41.5,4.94 49.095,4.94 49.135,4.9 ; 31.225,18.875 32.95,18.875 40.175,11.65 40.175,8.805 41.5,7.48 49.094,7.48 49.135,7.439 ; 31.225,19.375 33.225,19.375 41.5,11.1 41.5,10.02 41.543,9.977 49.135,9.977 ; 31.225,19.875 34.185,19.875 41.5,12.56 45.57,12.56 49.091,12.56 49.135,12.516 ; 31.225,20.375 34.5,20.375 39.775,15.1 41.5,15.1 45.57,15.1 49.09,15.1 49.135,15.055 ; 31.225,20.875 35.275,20.875 38.51,17.64 41.5,17.64 45.57,17.64 49.088,17.64 49.135,17.593 ; 31.225,21.375 35.95,21.375 37.145,20.18 41.5,20.18 45.57,20.18 49.087,20.18 49.135,20.132 ; 31.225,21.875 36.575,21.875 37.625,20.825 39.605,20.825 41.5,22.72 49.085,22.72 49.135,22.67 ; 31.225,22.375 35.725,22.375 37.35,24 40.24,24 41.5,25.26 41.551,25.209 49.135,25.209 ; 31.225,22.875 34.925,22.875 36.925,24.875 36.925,25.825 37.625,26.525 40.225,26.525 41.5,27.8 49.083,27.8 49.135,27.748 ; 31.225,23.375 34.025,23.375 36.15,25.5 36.15,28 37.175,29.025 40.185,29.025 41.5,30.34 49.081,30.34 49.135,30.286 ; 31.225,23.875 33.325,23.875 35.4,25.95 35.4,29.65 37.3,31.55 40.17,31.55 41.5,32.88 49.08,32.88 49.135,32.825 ; 34.427,88.455 34.427,87.65 35.773,86.304 35.773,85.542 36.289,85.026 40.607,85.026 41.242,85.661 41.242,87.947 39.972,89.217
  Top Layer w0.508: 3.28,15.725 3.28,18.014 3.316,18.05 3.316,19.675 ; 3.483,91.532 3.483,91.383 6.763,91.383 8.182,92.802 18.977,92.802 20.882,90.897 20.882,88.492 ; 3.875,41.665 5.15,41.665 6.075,42.59 7,41.665 8.317,41.665 ; 3.875,43.205 3.875,46.2 4.625,46.95 10.525,46.95 15,42.475 17.05,42.475 17.05,42.95 ; 4.475,30.16 5.835,28.8 7.575,28.8 ; 4.475,32.7 4.725,32.45 7.6,32.45 ; 4.475,35.24 7.341,35.24 7.351,35.25 ; 4.475,37.78 7.346,37.78 7.351,37.775 ; 4.856,17.708 4.856,19.675 ; 4.872,79.789 5.007,79.654 5.007,77.689 ; 6.412,70.704 8.632,70.704 9.14,71.212 12.061,68.291 v6(12.881,68.291) ; 10.214,91.246 15.453,91.246 15.802,90.897 15.802,88.492 15.54,88.23 ; 10.595,82.261 16.564,82.261 17.58,81.245 ; 12.75,13.375 13.725,14.35 15.55,14.35 17.752,16.551 20.477,16.551 22.3,18.375 23.25,18.375 ; v6(13.008,73.752) 15.04,73.752 ; v6(13.135,83.658) 14.913,83.658 17.58,86.325 19.67,86.325 21.144,87.799 21.144,88.23 22.128,87.246 26.343,87.246 ; 15.275,34.145 15.275,35.755 16.12,36.6 ; 17.08,88.23 19.604,88.23 ; 17.475,34.095 17.475,37.8 17.625,37.95 19.85,37.95 21.2,36.6 22.1,35.7 22.1,34.145 ; 18.66,36.6 19.75,35.51 19.75,34.095 ; 20.2,42.475 23.4,42.475 24.45,43.525 32.825,43.525 33.675,42.675 34.5,42.675 ; 23.25,21.875 26.475,21.875 ; 24.946,68.029 27.105,68.029 ; 26.975,25.1 26.975,29.9 27.525,30.45 ; 27.175,8.97 28.3,10.095 28.3,13.975 27.975,14.3 27.975,17.15 ; v9(28.2,36.2) 31.85,36.2 33.35,37.7 35.3,37.7 38.6,41 ; 30.15,25.225 30.15,29.675 ; 31.985,40.135 34.5,40.135 ; 34.899,69.477 35.014,69.362 36.328,69.362 ; 34.899,71.239 35.522,71.862 36.328,71.862 ; 37.578,72.612 37.578,74.537 ; 39.078,72.612 39.078,73.394 39.344,73.66 39.852,73.66 39.979,73.787 39.979,74.549 42.519,77.089 42.519,77.978 ; 40.348,69.342 40.995,69.342 41.249,69.596 41.249,72.771 40.995,73.025 ; v9(44.8,36.775) 48.6,40.575 48.6,41 ; 65.512,76.503 65.512,74.933 65.847,74.598 ; 65.512,78.603 65.512,77.862 65.855,77.519 ; 66.312,76.503 66.312,77.062 65.855,77.519 ; 70.3,74.979 68.776,76.503 68.776,77.265 68.522,77.519 65.855,77.519
  Top Layer w0.762: 27.525,30.45 29.375,30.45 30.15,29.675
  Top Layer w1.016: 2.335,24.025 2.335,22.645 3.33,21.65 2.375,21.65 1.85,21.125 1.85,13.875 2.975,12.75 4.175,12.75 4.175,9.775 4.175,8.555 5.68,7.05 5.68,5.125 4.475,5.125 3.35,4 3.35,2.325 ; 4.82,15.725 5.985,14.56 7.825,14.56 6.715,13.45 6.715,12.75 6.715,9.775 7.22,9.27 7.22,7.05 7.22,5.125 7.22,3.245 6.3,2.325 6.65,1.975 27.25,1.975 32.225,6.95 32.225,8.175 31.125,7.075 27.9,7.075 27.175,7.8 ; 6.075,45.21 6.312,45.21 8.317,43.205 12.57,43.205 15.25,40.525 21.425,40.525 24.613,37.338 ; v3(14.875,46.35) 15.175,46.35 16.675,44.85 36.75,44.85 37.7,43.9 39.95,43.9 42.05,46 43.6,46 ; 22.205,32.5 25.45,32.5 26.475,31.475 ; 23.1,7.88 25.102,7.88 27.095,7.88 27.175,7.8 ; 25.05,32.525 25.05,36.9 24.613,37.338 ; 27.175,8.97 27.175,7.8 ; 28.675,38.875 27.138,37.338 24.613,37.338 ; 30.475,25.4 30.475,31.75 34.15,35.425 49.875,35.425 50.675,34.625 50.675,32.825 50.675,30.286 50.675,27.748 50.675,25.209 50.675,22.67 50.675,20.132 50.675,17.593 50.675,15.055 50.675,12.516 50.675,9.977 50.675,7.439 50.675,4.9 50.675,3.925 49.075,2.325 39.1,2.325 37.5,3.925 37.5,6.971 35.971,8.5 34.042,8.5 32.113,8.5 32.113,8.063 ; v10(33.629,71.501) 33.891,71.239 34.899,71.239 ; 34.899,72.779 33.756,73.922 33.756,78.994 34.264,79.502 36.804,79.502 37.558,78.748 37.558,78.359 37.558,74.557 37.566,74.549 ; 34.977,92.005 35.041,92.005 ; 35.225,91.757 39.972,91.757 ; 37.305,88.201 37.305,86.312 39.607,86.312 ; 37.305,89.741 37.305,91.503 ; 39.098,78.359 42.138,78.359 42.519,77.978 ; 40.995,73.025 40.995,73.914 42.519,75.438 ; 56.203,87.659 57.739,89.195 58.997,89.195 v3@60.91,89.195 ; 57.678,60.654 61.742,60.654 ; 57.678,63.194 61.742,63.194 ; 57.678,65.734 61.742,65.734 ; 57.678,68.274 61.742,68.274 ; 58.856,86.488 58.856,86.317 56.457,86.317 ; v3(60.902,89.203) v3@60.91,89.195 ; v3(61.029,90.981) 60.783,90.735 58.997,90.735 56.329,90.735 56.203,90.609 54.307,90.609 53.663,89.965 53.663,86.987 54.333,86.317 56.457,86.317 ; 61.156,86.488 61.156,84.885 61.664,84.377 65.728,84.377 65.736,84.385 67.887,84.385 68.776,85.274 68.776,88.264 66.431,90.609 66.363,90.609 66.248,90.724 ; 63.569,90.724 66.248,90.724 ; 64.312,76.503 64.312,75.214 63.188,74.09 59.124,74.09 56.457,76.757 56.457,86.317 ; 65.847,74.598 63.815,72.566 58.235,72.566 54.679,76.122 54.679,83.996 52.266,86.409 52.266,90.854 53.79,92.378 64.594,92.378 66.248,90.724 ; 66.363,87.659 65.192,86.488 63.456,86.488 63.456,89.071 63.332,89.195 v3@60.91,89.195
  Bottom Layer w0.254: v2(15.069,85.661) 16.31,84.42 16.31,74.768 19.612,71.466 19.612,70.958 ; v2(17.961,78.832) 18.85,79.721 18.85,82.007 v2(18.723,82.134) ; 20.12,83.785 20.12,79.594 v2(18.088,77.562) 21.898,77.562 22.406,77.054 v2(22.406,70.577) ; 35.153,77.851 40.106,77.851 40.614,77.343 v2(40.614,76.835) ; v2(62.172,75.487) 68.268,75.487 70.3,77.519 ; v2(64.712,80.059) 70.3,80.059 ; v2(66.236,80.948) 69.169,83.881 69.169,85.607 70.3,86.738 70.3,87.679
  Bottom Layer w0.381: v11(27.55,29.225) 27.55,32.275 28.7,33.425 37.72,33.425 38.3,32.845 ; v5@28,28.45 v5(27.975,28.425) 27.975,31.575 29.075,32.675 35.93,32.675 38.3,30.305 ; v5(28.45,29.3) 28.45,30.975 29.525,32.05 33,32.05 37.285,27.765 38.3,27.765 ; v5(28.975,28.4) 28.975,30.425 29.825,31.275 32.25,31.275 38.3,25.225 ; v5(29.5,29.35) 30.225,30.075 31.7,30.075 38.3,23.475 38.3,22.685
  Bottom Layer w0.508: 4.475,30.16 6.15,31.835 21.085,31.835 24.225,34.975 31.925,34.975 33.725,36.775 v9(44.8,36.775) ; 4.475,32.7 5.725,33.95 21.9,33.95 24.15,36.2 v9(28.2,36.2) ; 8.309,68.545 10.976,68.545 12.119,69.688 12.119,73.114 11.738,73.495 11.738,89.722 10.214,91.246 ; v6(12.881,68.291) 13.008,68.418 v6(13.008,73.752) 13.135,73.879 v6(13.135,83.658) ; 18.66,36.6 18.66,40.865 17.05,42.475 17.05,45.425 19.025,47.4 25.5,47.4 32.1,47.4 ; 21.2,36.6 21.2,39.225 23.825,41.85 26.775,41.85 27.9,40.725 30.475,40.725 31.525,39.675
  Bottom Layer w1.016: 4.175,9.775 4.475,10.075 ; 4.175,12.75 4.175,13.95 5.275,15.05 10.75,15.05 12.725,13.075 ; v3(10.225,43.325) 10.225,45.125 11.525,46.425 11.6,46.35 v3(14.875,46.35) ; v10(33.629,71.501) 33.756,71.501 33.756,79.121 34.137,79.502 40.995,79.502 42.519,77.978 ; v3(60.902,89.203) 60.902,74.725 62.553,73.074 69.538,73.074 70.3,73.836 70.3,74.979 ; v3(61.029,90.981) 62.426,92.378 68.141,92.378 70.3,90.219
  other v1: 26.125,18.925 27.225,18.925 28.325,18.925 29.425,18.925 25.025,20.025 27.225,20.025 29.425,20.025 25.025,21.125 26.125,21.125 28.325,21.125 29.425,21.125 25.025,22.225 26.125,22.225 27.225,22.225 28.325,22.225 29.425,22.225 25.025,23.325 26.125,23.325 27.225,23.325 28.325,23.325 29.425,23.325
  other v4: 6.145,74.641 29.137,74.641 6.145,92.641 29.137,92.641
  other v7: 12.7,2.775 28.7,49.175
  other v8: 12.7,9.775 28.7,42.175

## Polygon pours and split planes (outlines as drawn)
no net on Top Layer "Keep-Out Layer-No Net" (solid, remove dead copper, pour order 42): 72.078,93.394 51.123,93.394 51.123,71.677 72.078,71.677
no net on Top Layer "Keep-Out Layer-No Net" (solid, remove dead copper, pour order 36): 1.578,66.894 30.407,66.894 30.407,93.818 1.578,93.818
no net on Top Layer "Keep-Out Layer-No Net" (solid, remove dead copper, pour order 28): 44.17,80.264 44.17,66.929 32.74,66.929 32.74,80.264
no net on Top Layer "Keep-Out Layer-No Net" (solid, remove dead copper, pour order 16): 33.495,84.518 41.75,84.518 41.75,93.408 33.495,93.408
no net on Top Layer "Keep-Out Layer-No Net" (solid, remove dead copper, pour order 12): 0.7,0.7 52.7,0.7 52.7,50.7 0.7,50.8
no net on Bottom Layer "Keep-Out Layer-No Net" (solid, remove dead copper, pour order 40): 72.078,71.677 51.123,71.677 51.123,93.394 72.078,93.394
no net on Bottom Layer "Keep-Out Layer-No Net" (solid, remove dead copper, pour order 38): 1.578,93.818 30.407,93.818 30.407,66.894 1.578,66.894
no net on Bottom Layer "Keep-Out Layer-No Net" (solid, remove dead copper, pour order 30): 44.17,80.264 32.74,80.264 32.74,66.929 44.17,66.929
no net on Bottom Layer "Keep-Out Layer-No Net" (solid, remove dead copper, pour order 18): 33.495,84.518 41.75,84.518 41.75,93.408 41.115,93.408 33.495,93.408
no net on Bottom Layer "Keep-Out Layer-No Net" (solid, remove dead copper, pour order 14): 0.7,50.7 52.675,50.7 52.675,0.7 0.7,0.7

## Keep-outs
Keep-Out Layer:
  lines w0.1: 0,0 53.5,0 53.5,50.8 80.1,50.8 80.1,98 0,98 0,0

## Other copper
Top Layer:
  text "DHT12" at 56.478,70.194 h1
  text "排针" at 60.878,70.094 h1

## Silkscreen, mask and mechanical layers (free items; w line width, h text height)
Top Overlay:
  text "BISS0001" at 9.478,95.294 h3
  text "TEMT6000" at 32.978,95.194 h3
  text "MAX30100" at 55.178,95.094 h3
  text "3.3V" at 42.278,91.294 h3
  text "+" at 0.078,90.394 h3
  text "3.3V" at 73.078,89.494 h3
  text "SIG" at 42.378,88.394 h3
  text "A" at -0.122,87.894 h3
  text "SDA" at 73.178,86.911 h3
  text "-" at 0.378,85.794 h3
  text "GND" at 42.378,85.494 h3
  text "SCL" at 73.078,84.327 h3
  text "INT" at 73.078,81.712 h3
  text "MPU6050" at 33.778,81.494 h3
  text "IRD" at 73.078,79.128 h3
  text "3.3V" at 44.4,77.294 h3
  text "RD" at 72.978,76.545 h3
  text "GND" at 44.4,74.694 h3
  text "GND" at 72.778,73.994 h3
  text "SCL" at 44.4,72.094 h3
  text "SDA" at 44.4,69.494 h3
  text "VDD" at 63.781,67.694 h3
  text "SDA" at 63.778,64.906 h3
  text "SeanOY" at 24.178,63.394 h3
  text "GND" at 63.778,62.15 h3
  text "SIG" at 6.64,62.045 h3 r90
  text "3.3V" at 9.378,60.994 h3 r90
  text "GND" at 3.878,60.704 h3 r90
  text "Sensors Function Test Board" at 13.378,60.694 h3
  text "DHT12" at 55.578,60.494 h3 r90
  text "SCL" at 63.778,59.394 h3
  text "SeanOY" at 28.9,4.3 h3
  text "Speech Recognition Board" at 18.7,1.5 h3

## Text inside footprints (layer, text, board x,y; h text height)
Q1: Top Overlay "C" at 35.252,92.78 h1 r90; Top Overlay "E" at 34.727,87.105 h1 r90